# Altium PCB PoactuatorPCB4.PcbDoc (part 1 of 3)
Units mm, origin at the board's own origin, x right, y up, seen from the top; angles counter-clockwise.
Board outline 177.8 x 127 mm, 2 copper layers (Top Layer, Bottom Layer), stack 1.65 mm thick; 145 components, 104 nets, 572 pads, 279 vias.
Unrouted connection lines stored in the file: 19.
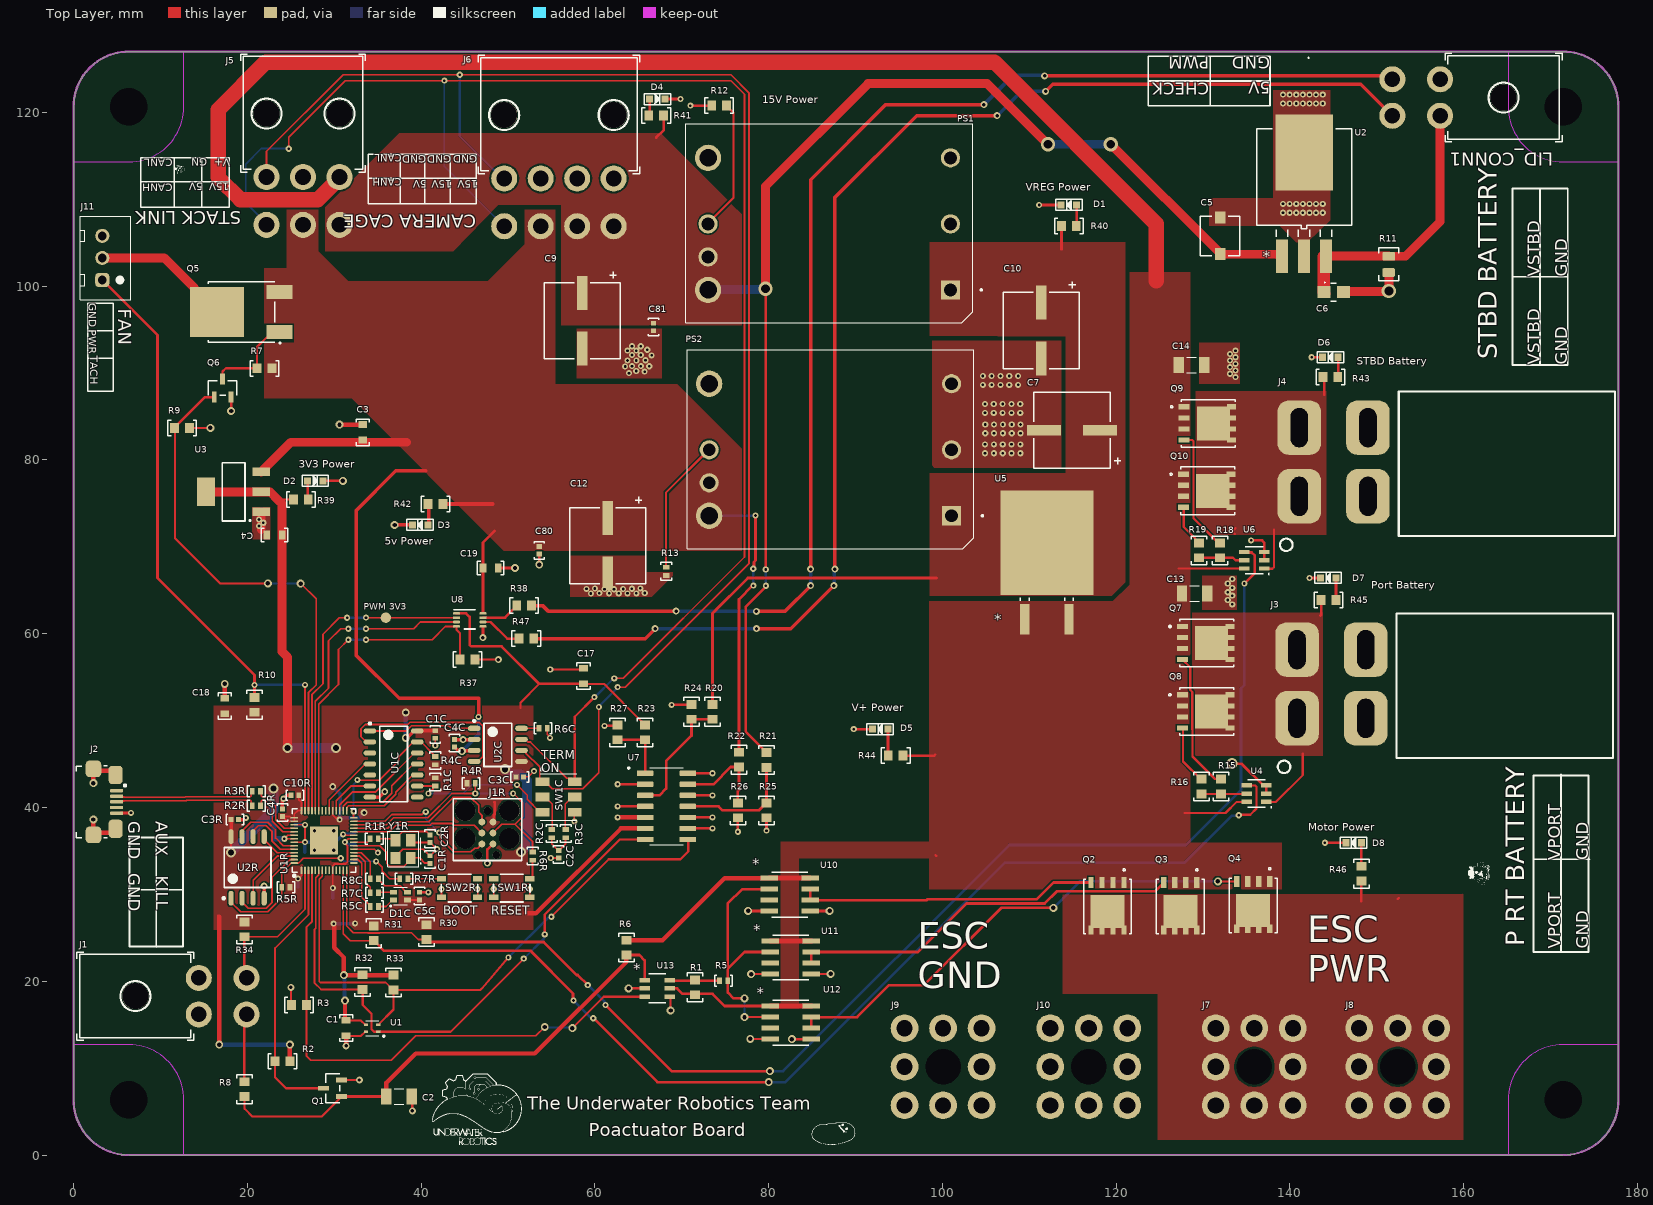
[diagram p0: Top Layer view]
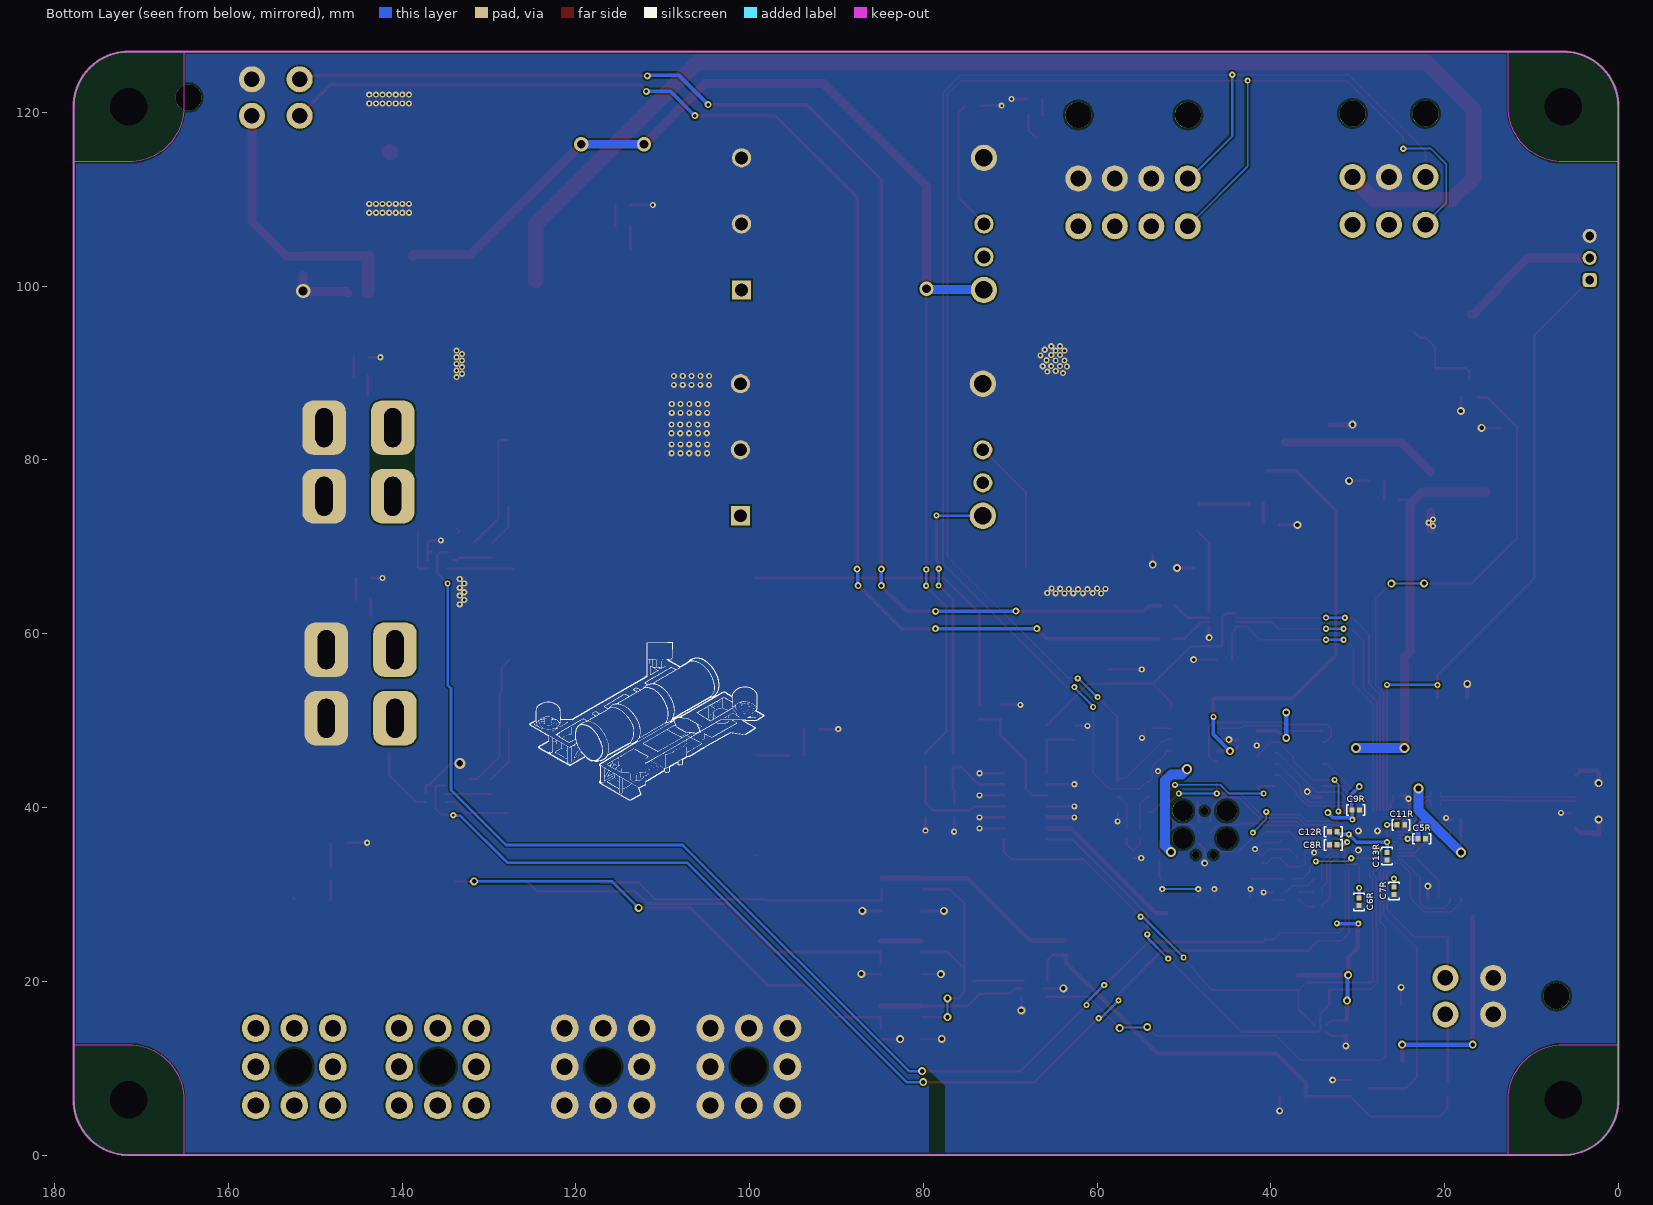
[diagram p1: Bottom Layer view, seen from below]
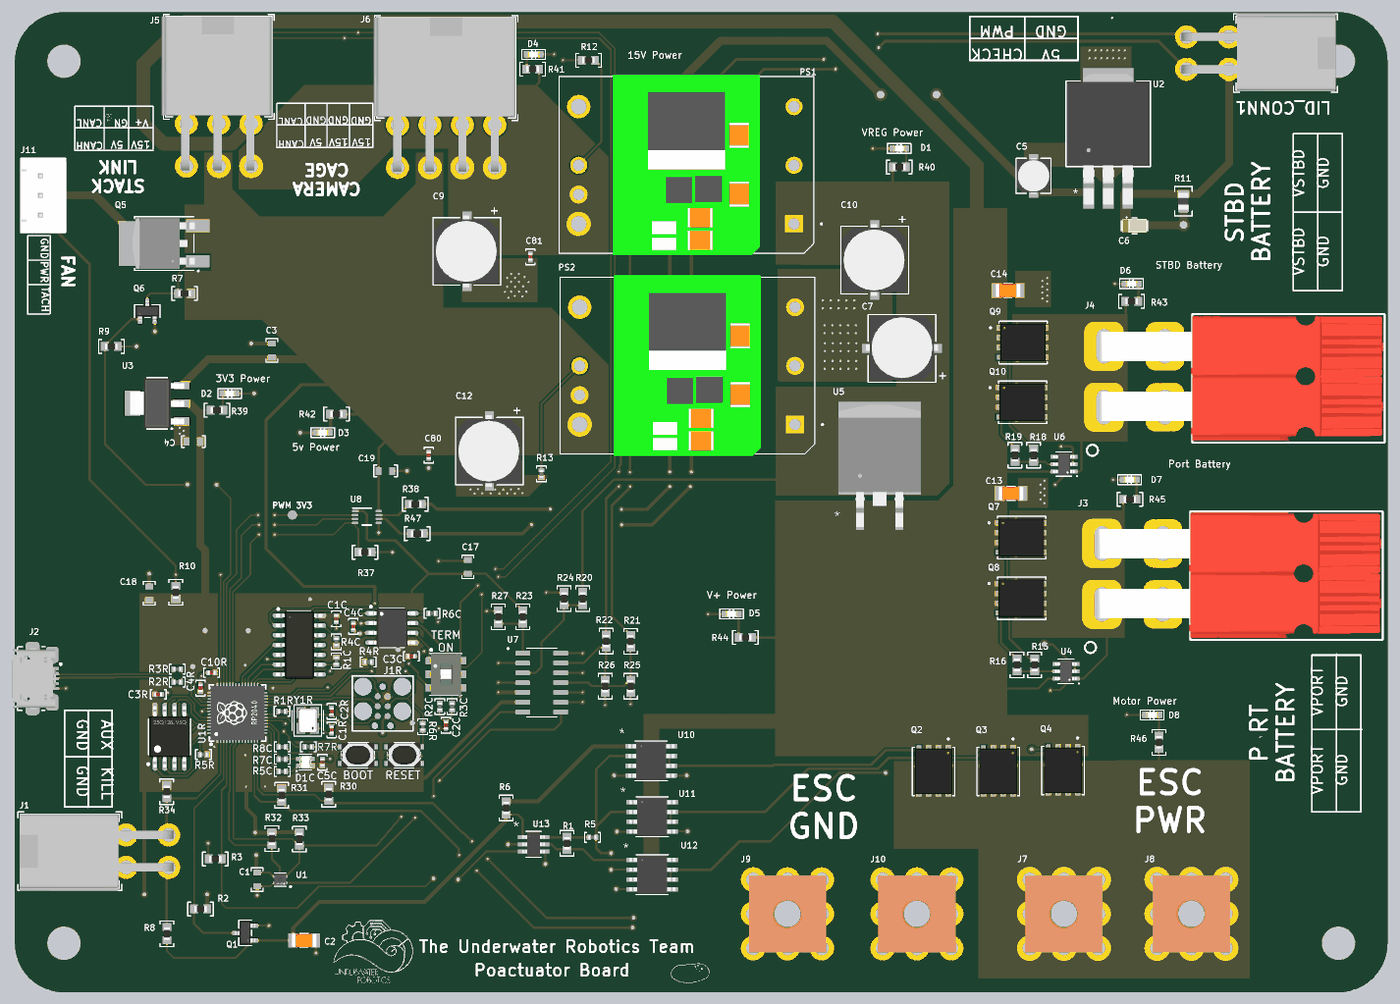
[diagram p3: 3D render of the assembled board from above, using the file's embedded part models]
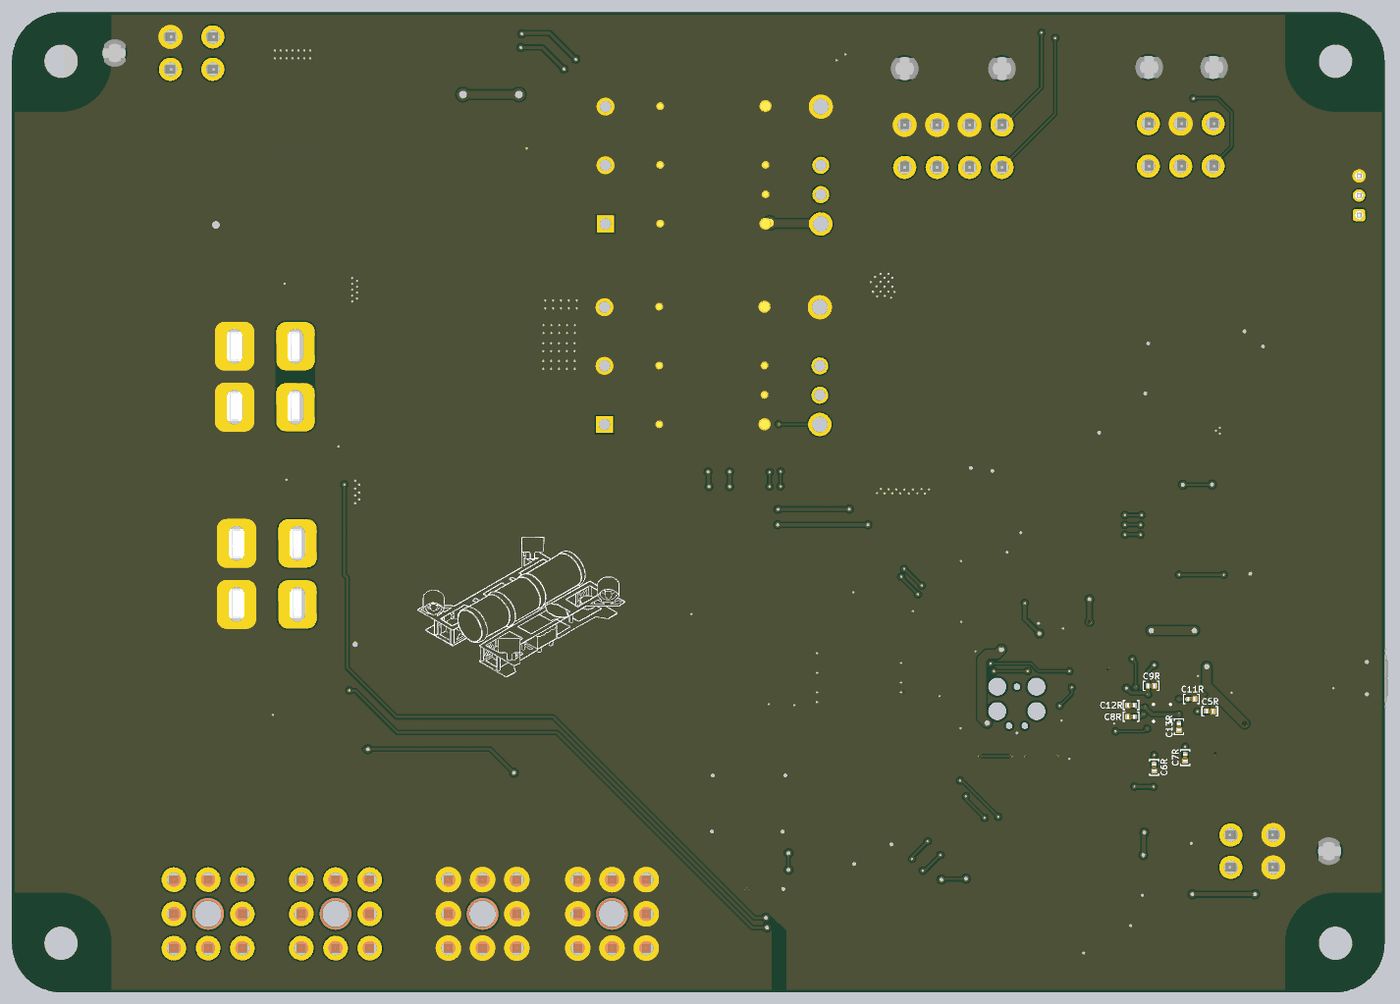
[diagram p4: 3D render of the assembled board from below, using the file's embedded part models]

## Layer stack, top to bottom
Top Solder: solder mask 0.0127, Solder Resist, Dk 3.8
Top Layer: signal copper 0.075
Dielectric: core 1.5, FR-4, Dk 4.5
Bottom Layer: signal copper 0.075
Bottom Solder: solder mask 0.0127, Solder Resist, Dk 3.8

## Board outline
0,6.35 0,120.65 cw(c6.35,120.65) 6.35,127 171.45,127 cw(c171.45,120.65) 177.8,120.65 177.8,6.35 cw(c171.45,6.35) 171.45,0 6.35,0 cw(c6.35,6.35)

## Design rules (kind name [scope] priority, off if disabled: settings)
AcuteAngle [All] p1 off: minimum=6.00000000000000E+0001 checktracksonly=FALSE
BoardOutlineClearance "BoardOutlineClearance JLCPCB" [All] p1: gap=0.2 ignorepadtopadclearanceinfootprint=FALSE
Clearance "Clearance JLCPCB 2oz" [All] p1: gap=0.2 ignorepadtopadclearanceinfootprint=FALSE except(0.254: Arc-Hole Track-Hole SMDPad-Hole THPad-Hole Via-Hole Fill-Hole Poly-Hole Region-Hole Text-Hole)
DiffPairsRouting [All] p1: maxlimit=0.254 minlimit=0.152 mostfreqgap=0.203 toplayer_minwidth=0.203 toplayer_maxwidth=0.381 toplayer_prefwidth=0.203 bottomlayer_minwidth=0.203 bottomlayer_maxwidth=0.381 bottomlayer_prefwidth=0.203 maxuncoupledlength=12.7
HoleSize "HoleSize JLCPCB Pad" [IsPad] p1: absolutevalues=TRUE maxlimit=6.3 minlimit=0.5 maxpercent=80.000 minpercent=20.000
HoleSize "HoleSize JLCPCB 2 layer" [All] p2: absolutevalues=TRUE maxlimit=6.3 minlimit=0.3 maxpercent=80.000 minpercent=20.000
HoleToHoleClearance "HoleToHoleClearance JLCPCB" [All] p1: gap=0.254 allowstackedmicrovias=TRUE
MinimumAnnularRing "MinimumAnnularRing JLCPCB Pad" [IsPad] p1: minimumring=0.3
MinimumAnnularRing "MinimumAnnularRing JLCPCB 2oz" [All] p2: minimumring=0.2
MinimumSolderMaskSliver [All] p1: minsoldermaskwidth=0.025
PlaneConnect [All] p1: planeconnectstyle=Direct reliefexpansion=0.508 reliefentries=4 reliefconductorwidth=0.254 reliefairgap=0.254
PolygonConnect "PolygonConnect 3V3" [InNet('3V3')] p1: thpad.connectstyle=Relief thpad.reliefconductorwidth=0.254 thpad.reliefentries=4 thpad.polygonreliefangle="90 Angle" thpad.airgapwidth=0.254 smdpad.connectstyle=Relief smdpad.reliefconductorwidth=0.254 smdpad.reliefentries=4 smdpad.polygonreliefangle="90 Angle" smdpad.airgapwidth=0.254 via.connectstyle=Direct via.reliefconductorwidth=0.254 via.reliefentries=4 via.polygonreliefangle="90 Angle" via.airgapwidth=0.254
PolygonConnect "PolygonConnect Direct Connect" [All] p2: connectstyle=Direct reliefconductorwidth=0.381 reliefentries=4 polygonreliefangle="45 Angle" airgapwidth=0.254
RoutingVias "RoutingVias JLCPCB" [All] p1: holewidth=0.4 width=0.8 viastyle="Through Hole" minholewidth=0.3 minwidth=0.4 maxholewidth=0.711 maxwidth=1.27
SilkToSilkClearance [All] p1: silktosilkclearance=0.076
SilkToSolderMaskClearance "SilkToSolderMaskClearance JLCPCB" [IsPad] p1: minsilkscreentomaskgap=0.15 clearancetoexposedcopper=TRUE
SolderMaskExpansion "SolderMaskExpansion JLCPCB" [All] p1: expansion=0.05 istentingtop=FALSE
Width "Width JLCPCB 2oz" [All] p1: maxlimit=5.08 minlimit=0.2 preferedwidth=0.254 minimp=50.000000 maximp=50.000000 favimp=50.000000
23 further rules are at their usual default settings.

## Classes and differential pairs
component class U_PD_MK2_Killswitch: C2 Q1 Q2 Q3 Q4 R1 R2 R3 R5 R6 R8 U10 U11 U12 U13
differential pair class "USB 2.0": USB USB_RP2040
component class U_RP2040_with_CAN: C1C C2C C3C C4C C5C D1C R1C R2C R3C R4C R5C R6C R7C R8C SW1C U1C U2C
component class U_RP2040_C: C1R C2R C3R C4R C5R C6R C7R C8R C9R C10R C11R C12R C13R J1R R1R R2R R3R R4R R5R R6R R7R SW1R SW2R U1R U2R Y1R
component class U_PD_MK2_Circuits: C1 C17 C18 C19 Q5 Q6 R7 R9 R10 R20 R21 R22 R23 R24 R25 R26 R27 R30 R31 R32 R33 R34 R37 R38 R47 U1 U7 U8
component class U_PD_MK2_Power: C3 C4 C5 C6 C7 C9 C10 C12 C13 C14 C80 C81 PS1 PS2 Q7 Q8 Q9 Q10 R11 R12 R13 R15 R16 R18 R19 U2 U3 U4 U5 U6
component class Poactuator_Connectors: D1 D2 D3 D4 D5 D6 D7 D8 J1 J2 J3 J4 J5 J6 J7 J8 J9 J10 J11 R39 R40 R41 R42 R43 R44 R45 R46
differential pair USB: +USB_P -USB_N
differential pair USB_RP2040: +USB_RP2040_P -USB_RP2040_N

## Components (designator, comment, footprint, x,y, rotation, side; value= is the part's Value field where it differs from the comment)
C1 "100nF Ceramic 6.3V" CAPACITOR_0603 31.369,14.605 r270 top value=0.1uF
C1C "100nF Ceramic 25V" CAPACITOR_0402#1 41.629,48.405 r270 top value=0.1uF
C1R "27pF Ceramic 50V" CAPACITOR_0402#1 41.029,34.005 r90 top value=27pF
C2 "10uF Ceramic 25V" CAPACITOR_1206 37.465,6.731 r0 top
C2C "4700pF Ceramic 25V" CAPACITOR_0402#1 55.829,34.605 r90 top value=4.7nF
C2R "27pF Ceramic 50V" CAPACITOR_0402#1 41.029,36.405 r270 top value=27pF
C3 "10uF Ceramic 6.3V" CAPACITOR_0603 33.274,83.185 r90 top
C3C "100nF Ceramic 25V" CAPACITOR_0402#1 51.358,43.525 r0 top value=0.1uF
C3R "100nF Ceramic 6.3V" CAPACITOR_0402#1 18.559,38.605 r0 top value=0.1uF
C4 "10uF Ceramic 6.3V" CAPACITOR_0603 23.114,71.361 r180 top
C4C "100nF Ceramic 25V" CAPACITOR_0402#1 43.829,47.405 r90 top value=0.1uF
C4R "1uF Ceramic 16V" CAPACITOR_0402#1 24.029,39.405 r90 top value=1uF
C5 "0.1uF electrolytic 35 V" U2-D_NCH 131.953,105.791 r90 top value=0.1uF
C5C "1uF Ceramic 16V" CAPACITOR_0402#1 39.829,29.805 r90 top value=1uF
C5R "100nF Ceramic 6.3V" CAPACITOR_0402#1 22.629,36.405 r180 bottom value=0.1uF
C6 "10uF Tantalum 16V" "CAPACITOR_1206 - POLAR" 145.034,99.314 r0 top
C6R "100nF Ceramic 6.3V" CAPACITOR_0402#1 29.845,29.137 r270 bottom value=0.1uF
C7 "100uF electrolytic 35 V" PCAP_8x5.4-ELECT_NCA 114.91,83.439 r180 top value=100uF
C7R "100nF Ceramic 6.3V" CAPACITOR_0402#1 25.829,30.405 r270 bottom value=0.1uF
C8R "100nF Ceramic 6.3V" CAPACITOR_0402#1 32.829,35.702 r0 bottom value=0.1uF
C9 "22uF electrolytic 35 V" PCAP_8x5.4-ELECT_NCA 58.547,96.012 r270 top value=22uF
C9R "100nF Ceramic 6.3V" CAPACITOR_0402#1 30.229,39.705 r180 bottom value=0.1uF
C10 "100uF electrolytic 35 V" PCAP_8x5.4-ELECT_NCA 111.379,94.894 r270 top value=100uF
C10R "100nF Ceramic 6.3V" CAPACITOR_0402#1 25.473,41.412 r180 top value=0.1uF
C11R "1uF Ceramic 16V" CAPACITOR_0402#1 25.029,38.005 r180 bottom value=1uF
C12 "22uF electrolytic 35 V" PCAP_8x5.4-ELECT_NCA 61.468,70.129 r270 top value=22uF
C12R "100nF Ceramic 6.3V" CAPACITOR_0402#1 32.829,37.205 r0 bottom value=0.1uF
C13 "10uF Ceramic 25V" CAPACITOR_1206 129.032,64.643 r0 top
C13R "100nF Ceramic 6.3V" CAPACITOR_0402#1 26.629,34.405 r270 bottom value=0.1uF
C14 "10uF Ceramic 25V" CAPACITOR_1206 128.651,90.932 r0 top
C17 "100nF Ceramic 6.3V" CAPACITOR_0603 58.674,55.118 r90 top value=0.1uF
C18 "100nF Ceramic 6.3V" CAPACITOR_0603 17.399,51.689 r90 top value=0.1uF
C19 "100nF Ceramic 6.3V" CAPACITOR_0603 48.006,67.564 r0 top value=0.1uF
C80 "CL05A104KA5NNNC" CAPACITOR_0402#2 53.594,69.596 r270 top
C81 "CL05A104KA5NNNC" CAPACITOR_0402#2 66.76,95.3 r270 top
D1 "IN-S63AT5G" LED_0603 114.554,109.347 r180 top
D1C "EAST1616RGBB4" LED_0606_4SMD 37.629,29.805 r0 top
D2 "IN-S63AT5G" LED_0603 27.813,77.597 r0 top
D3 "IN-S63AT5G" LED_0603 39.878,72.517 r180 top
D4 "IN-S63AT5G" LED_0603 67.183,121.539 r0 top
D5 "IN-S63AT5G" LED_0603 92.837,49.022 r180 top
D6 "IN-S63AT5G" LED_0603 144.653,91.821 r180 top
D7 "IN-S63AT5G" LED_0603 144.399,66.421 r180 top
D8 "IN-S63AT5G" LED_0603 147.32,35.941 r180 top
J1 "Mini-Fit Jr R/A" "CONN_MOLEX_MINIFIT JR_4 POS_R/A" 7.112,18.288 r270 top
J1R "TagConnect SWD" TC2030-MCP 47.629,39.605 r270 top
J2 "USB_MICRO R/A" CONN_MINIUSB 2.286,40.65 r270 top
J3 "PP45 R/A" "CONN_ANDERSON_PP45_4 POS_R/A" 148.717,50.266 r90 top
J4 "PP45 R/A" "CONN_ANDERSON_PP45_4 POS_R/A" 148.971,75.819 r90 top
J5 "Mini-Fit Jr R/A" "CONN_MOLEX_MINIFIT JR_6 POS_R/A" 30.607,119.861 r180 top
J6 "Mini-Fit Jr R/A" "CONN_MOLEX_MINIFIT JR_8 POS_R/A" 62.16,119.695 r180 top
J7 "Redcube M4 Term 85A" "Redcube M4 Term 85A" 135.89,10.16 r0 top
J8 "Redcube M4 Term 85A" "Redcube M4 Term 85A" 152.4,10.16 r0 top
J9 "Redcube M4 Term 85A" "Redcube M4 Term 85A" 100.076,10.16 r0 top
J10 "Redcube M4 Term 85A" "Redcube M4 Term 85A" 116.84,10.16 r0 top
J11 "XH2.54 VERT" CONN_JST_XH254_3POS_VERT 3.302,100.711 r90 top
LID_CONN1 "Comment" "CONN_MOLEX_MINIFIT JR_4 POS_R/A" 164.58,121.71 r90 top
PS1 "I6A4W020A033V-001-R" CONV_I6A4W020A033V-001-R 86.975,107.218 r180 top
PS2 "I6A4W020A033V-001-R" CONV_I6A4W020A033V-001-R 87.102,81.223 r180 top
"PWM 3V3" "Comment" TESTPOINT_1.2MM 35.941,61.849 r0 top
Q1 "MOSFET N-CH 30V 5.8A SOT-23-3" SOT-23-3 29.82,7.683 r90 top
Q2 "SIR167DP-T1-GE3" MOSFET_7DP-T1-GE3_VIS 118.999,28.639 r270 top
Q3 "SIR167DP-T1-GE3" MOSFET_7DP-T1-GE3_VIS 127.381,28.639 r270 top
Q4 "SIR167DP-T1-GE3" MOSFET_7DP-T1-GE3_VIS 135.763,28.765 r270 top
Q5 "FDD4141" DPAK_ONS 19.304,97.028 r90 top
Q6 "PMV13XNEAR" SOT-23-3 17.145,88.265 r0 top
Q7 "SIR167DP-T1-GE3" MOSFET_7DP-T1-GE3_VIS 130.365,58.928 r0 top
Q8 "SIR167DP-T1-GE3" MOSFET_7DP-T1-GE3_VIS 130.365,51.054 r0 top
Q9 "SIR167DP-T1-GE3" MOSFET_7DP-T1-GE3_VIS 130.556,84.201 r0 top
Q10 "SIR167DP-T1-GE3" MOSFET_7DP-T1-GE3_VIS 130.493,76.454 r0 top
R1 "47K" RESISTOR_0603#1 71.501,19.304 r270 top
R1C "10k Ohm 1% 1/16W" RESISTOR_0402 41.629,42.94 r270 top
R1R "1k Ohm 1% 1/16W" RESISTOR_0402 34.602,36.405 r0 top
R2 "100k Ohm 0.5% 1/10W" RESISTOR_0603#2 24.041,10.795 r180 top
R2C "60.4 Ohm 1% 1/16W" RESISTOR_0402 55.029,37.005 r270 top
R2R "27 Ohm 1% 1/16W" RESISTOR_0402 21.029,40.205 r0 top
R3 "10k Ohm 5% 1/10W" RESISTOR_0603#2 25.946,17.272 r0 top
R3C "60.4 Ohm 1% 1/16W" RESISTOR_0402 56.629,37.005 r270 top
R3R "27 Ohm 1% 1/16W" RESISTOR_0402 21.029,41.882 r0 top
R4C "10k Ohm 1% 1/16W" RESISTOR_0402 41.629,45.405 r90 top
R4R "10k Ohm 1% 1/16W" RESISTOR_0402 45.754,42.805 r0 top
R5 "1k Ohm 1% 1/16W" RESISTOR_0402 74.803,20.066 r180 top
R5C "604 Ohm 1% 1/16W" RESISTOR_0402 34.629,28.605 r0 top
R5R "10k Ohm 1% 1/16W" RESISTOR_0402 24.429,30.805 r180 top
R6 "100k Ohm 0.5% 1/10W" RESISTOR_0603#2 63.627,23.876 r270 top
R6C "10k Ohm 1% 1/16W" RESISTOR_0402 54.029,49.11 r0 top
R6R "1k Ohm 1% 1/16W" RESISTOR_0402 52.829,34.405 r90 top
R7 "1k Ohm 5% 1/8W" RESISTOR_0603#2 21.971,90.551 r180 top
R7C "200 Ohm 1% 1/16W" RESISTOR_0402 34.629,30.205 r0 top
R7R "1k Ohm 1% 1/16W" RESISTOR_0402 38.01,31.81 r180 top
R8 "1k Ohm 5% 1/8W" RESISTOR_0603#2 19.685,7.582 r90 top
R8C "200 Ohm 1% 1/16W" RESISTOR_0402 34.629,31.805 r0 top
R9 "1k Ohm 5% 1/8W" RESISTOR_0603#2 12.484,83.693 r0 top
R10 "10k Ohm 5% 1/10W" RESISTOR_0603#2 20.828,51.816 r90 top
R11 "1.2k Ohm 5% 1/2W" RESISTOR_0805 151.358,102.507 r270 top
R12 "RES 1.24K OHM 1% 1/10W 0603" RESISTOR_0603#2 74.295,120.777 r180 top
R13 "RES 8.56K OHM 1% 1/16W 0402" RESISTOR_0402 68.199,67.183 r270 top
R15 "27 Ohm 5% 1/8W" RESISTOR_0603#2 132.08,42.418 r270 top
R16 "27 Ohm 5% 1/8W" RESISTOR_0603#2 129.794,42.418 r270 top
R18 "27 Ohm 5% 1/8W" RESISTOR_0603#2 131.953,69.596 r270 top
R19 "27 Ohm 5% 1/8W" RESISTOR_0603#2 129.54,69.596 r270 top
R20 "10k Ohm 0.5% 1/10W" RESISTOR_0603#2 73.533,51.016 r270 top
R21 "10k Ohm 0.5% 1/10W" RESISTOR_0603#2 79.756,45.466 r270 top
R22 "10k Ohm 0.5% 1/10W" RESISTOR_0603#2 76.581,45.504 r270 top
R23 "10k Ohm 0.5% 1/10W" RESISTOR_0603#2 65.786,48.641 r270 top
R24 "1k Ohm 5% 1/10W" RESISTOR_0603#2 71.12,51.016 r90 top
R25 "1k Ohm 5% 1/10W" RESISTOR_0603#2 79.756,39.662 r270 top
R26 "1k Ohm 5% 1/10W" RESISTOR_0603#2 76.454,39.662 r270 top
R27 "10k Ohm 0.5% 1/10W" RESISTOR_0603#2 62.611,48.641 r90 top
R30 "470k Ohm 5% 1/10W" RESISTOR_0603#2 40.64,25.654 r270 top
R31 "470k Ohm 5% 1/10W" RESISTOR_0603#2 34.544,25.527 r270 top
R32 "4.7k Ohm 5% 1/10W" RESISTOR_0603#2 33.274,19.901 r270 top
R33 "4.7k Ohm 5% 1/10W" RESISTOR_0603#2 36.83,19.86 r270 top
R34 "1k Ohm 5% 1/8W" RESISTOR_0603#2 19.658,25.974 r270 top
R37 "10k Ohm 5% 1/10W" RESISTOR_0603#2 45.339,57.023 r0 top
R38 "330 Ohm 1% 1/10W" RESISTOR_0603#2 51.854,63.246 r180 top
R39 "5.1K" RESISTOR_0603#1 26.162,75.438 r0 top
R40 "3.9k Ohm 5% 1/10W" RESISTOR_0603#2 114.554,106.934 r0 top
R41 "4.7k Ohm 5% 1/10W" RESISTOR_0603#2 67.056,119.634 r180 top
R42 "1k Ohm 5% 1/8W" RESISTOR_0603#2 41.656,74.93 r180 top
R43 "3.9k Ohm 5% 1/10W" RESISTOR_0603#2 144.653,89.535 r0 top
R44 "3.9k Ohm 5% 1/10W" RESISTOR_0603#2 94.615,45.974 r180 top
R45 "3.9k Ohm 5% 1/10W" RESISTOR_0603#2 144.437,63.881 r0 top
R46 "3.9k Ohm 5% 1/10W" RESISTOR_0603#2 148.209,32.385 r90 top
R47 "330 Ohm 1% 1/10W" RESISTOR_0603#2 52.108,59.436 r180 top
SW1C "Switch DPDT" CAS-220TA 55.829,41.205 r270 top
SW1R "434123025826" SMD_434123025826 50.429,30.73 r0 top
SW2R "434123025826" SMD_434123025826 44.429,30.73 r0 top
U1 "SHT14 SENSOR HUMID/TEMP" XDCR_SHT41-AD1B-R2 34.355,14.586 r180 top
U1C "MCP2517FD" SOIC-14 36.829,45.005 r0 top
U1R "RP2040" "QFN-56 RP2040" 28.829,36.205 r90 top locked
U2 "MIC29300-12WU-TR" TO-263-3_MCH 141.62,112.55 r0 top
U2C "CAN Transceiver" SOIC-8 48.829,47.205 r0 top
U2R "W25Q128JVSIQ" "SOIC-8 W25QxJV" 20.029,33.104 r90 top
U3 "LM1117IMPX-3.3/NOPB" SOT-223-4 18.415,76.327 r180 top
U4 "LTC4412ES6TRPBF" TSOT-23_S6 136.144,41.595 r180 top
U5 "MBRB2545CT" D2PAK_VIS 112.014,70.485 r0 top
U6 "LTC4412ES6TRPBF" TSOT-23_S6 135.89,68.453 r180 top
U7 "MCP3428-E/SL" SOIC127P600X175-14N 68.241,40.132 r0 top
U8 "IC TRANSLTR BIDIRECTIONAL 8VSSOP" TXB0102DCUR 45.593,61.595 r0 top
U10 "TC4432EOA713" SOIC8-N_MC_MCH 82.423,29.972 r0 top
U11 "TC4432EOA713" SOIC8-N_MC_MCH 82.55,22.733 r0 top
U12 "TC4432EOA713" SOIC8-N_MC_MCH 82.55,15.24 r0 top
U13 "DG448DV-T1-E3" TSOP6_DG_VIS-M 67.183,19.177 r0 top
Y1R "CRYSTAL 12.0000MHZ 18PF SMD" "4-SMD, NO LEAD CRYSTAL 3.2x2.5mm" 38.829,34.205 r90 top

## Footprints (in the part's own frame and the unit in brackets; to place one, negate y for a bottom-side part, rotate by r counter-clockwise, add the part's x,y. Pads: shape width x height; smd on the part's side, far side on the other; paste and mask are expansions set on the pad)
"4-SMD, NO LEAD CRYSTAL 3.2x2.5mm" [mm]
  rrect0% 1.4x1.1 smd: 1(0,0) 2(2.032,0) 3(2.032,1.778) 4(0,1.778)
  silkscreen extent -1.02,-1.2 3.05,2.92, body extent -0.58,-0.36 2.62,2.14, height 0.82
CAPACITOR_0402#1 [mm]
  rect 0.56x0.6 smd: 1(-0.435,0) 2(0.435,0)
  silkscreen extent -1.02,-0.6 1.02,0.6, body extent -0.5,-0.28 0.5,0.27, height 0.51
CAPACITOR_0402#2 [mm]
  rect 0.56x0.6 smd paste+0 mask+0: 1(-0.435,0) 2(0.435,0)
  silkscreen extent -1.02,-0.6 1.02,0.6, body extent -0.5,-0.28 0.5,0.27, height 0.51
CAPACITOR_0603 [mil] "CAPACITOR 0603"
  rect 30x40 smd: 1(-35,0) 2(35,0)
  silkscreen extent -60,-30 60,30, body extent -31,-16 32,16, height 31
CAPACITOR_1206 [mm]
  rect 1.2x1.82 smd: 1(-1.46,0) 2(1.46,0)
  silkscreen extent -0.54,-0.9 0.54,0.9, body extent -1.6,-0.9 1.6,0.9, height 1.61
"CAPACITOR_1206 - POLAR" [mil]
  rect 58.96x55 smd paste+0 mask+0: 1(-43.52,0) 2(43.52,0)
  silkscreen extent -44,-40 12,48, body extent -67,-36 67,36, height 73
CAS-220TA [mm] "SWITCH SLIDE DPDT 100MA 6V"
  rrect0% 1x1.6 smd: 1(-1.75,-1.85) 2(0,-1.85) 3(1.75,-1.85) 4(-1.75,1.85) 5(0,1.85) 6(1.75,1.85)
  silkscreen extent -3.3,-2.1 2.7,2.1, body extent -2.7,-2.1 2.7,2.1, height 2.51
"CONN_ANDERSON_PP45_4 POS_R/A" [mm] "Anderson Powerpole45 2x2 Red/Black"
  rrect50% 6.25x5 hole 2 slot 4.5 at 0 deg: 1(0,7.9) 2(7.9,7.9) 3(0,0) 4(7.9,0)
  silkscreen extent -6.31,-28.45 12.07,10.11, body extent -4.32,-28.26 11.84,8.45, height 16.17
CONN_JST_XH254_3POS_VERT [mm] "JST XH 2.54mm Pitch 3 Pos Vertical"
  rrect50% 1.62x1.62 hole 1.02: 1(0,0)
  round 1.62 hole 1.02: 2(2.54,0) 3(5.08,0)
  silkscreen extent -2.29,-3.3 7.37,2.54, body extent -2.34,-3.35 7.42,2.49, height 7.21
CONN_MINIUSB [mm] "USB2.0 Micro-B Receptacle SMD R/A"
  rrect50% 0.4x1.5 smd: 1(-1.3,2.675) 2(-0.65,2.675) 3(0,2.675) 4(0.65,2.675) 5(1.3,2.675)
  rrect50% 2.1x1.6 smd: 6(-3.1,2.55) 7(3.1,2.55)
  rrect50% 1.9x1.8 smd: 8(3.8,0) 9(-3.8,0)
  silkscreen extent -4.14,-1.96 4.11,3.75, body extent -3.96,-2.67 3.96,2.99, height 2.72
"CONN_MOLEX_MINIFIT JR_4 POS_R/A" [mm] "Molex Minifit Jr 5569 4 Pos R/A"
  round 3 hole 1.8: 1(2.1,7.3) 2(-2.1,7.3) 3(2.1,12.8) 4(-2.1,12.8)
  round 3 hole 3 unplated mask+0: ""(0,0)
  silkscreen extent -5.08,-6.73 5.08,6.73, body extent -4.8,-6.5 5.2,13.44, height 11.4
"CONN_MOLEX_MINIFIT JR_6 POS_R/A" [mm] "Molex Minifit Jr 5569 6 Pos R/A"
  round 3 hole 1.801: 1(8.4,7.3) 4(8.4,12.8)
  round 3 hole 1.8: 2(4.2,7.3) 3(0,7.3) 5(4.2,12.8) 6(0,12.8)
  round 3 hole 3 unplated mask+0: ""(0,0) ""(8.4,0)
  silkscreen extent -2.98,-6.86 11.38,6.73, body extent -2.58,-6.6 11.62,13.33, height 11.4
"CONN_MOLEX_MINIFIT JR_8 POS_R/A" [mm] "Molex Minifit Jr 5569 8 Pos R/A"
  round 3 hole 1.801: 1(12.6,7.3) 2(8.4,7.3) 5(12.6,12.8) 6(8.4,12.8)
  round 3 hole 1.8: 3(4.2,7.3) 4(0,7.3) 7(4.2,12.8) 8(0,12.8)
  round 3 hole 3 unplated mask+0: ""(0,0) ""(12.6,0)
  silkscreen extent -2.98,-6.86 15.58,6.73, body extent -2.7,-6.6 15.7,13.34, height 11.01
CONV_I6A4W020A033V-001-R [mm]
  rect 2.205x2.205 hole 1.47: 1(-13.95,7.65)
  round 2.205 hole 1.47: 2(-13.95,0.05) 3(-13.95,-7.55) 6(13.95,0.05) 7(13.95,3.85)
  round 3.03 hole 2.02: 4(13.95,-7.55) 8(13.95,7.65)
  silkscreen extent -17.6,-11.45 16.5,11.45, body extent -9.53,-11.68 9.53,11.68, height 9.65
D2PAK_VIS [mil]
  rect 41x138 smd paste+0 mask+0: 1(-100,-347) 3(100,-347)
  rect 422x474 smd paste+0 mask+0: 2(0,0)
  silkscreen extent -120,-264 120,-250, body extent -210,-402 210,223, height 190
DPAK_ONS [mil]
  rect 63x118 smd: 1(-90,-172.5) 2(90,-172.5)
  rect 228x244 smd: 3(0,109.5)
  silkscreen extent -142,-177 138,150, body extent -128,-156 129,160, height 94
LED_0603 [mil] "LED 0603"
  rect 32x32 smd: 1(-35,0) 2(35,0)
  silkscreen extent -60,-25 60,25, body extent -31,-16 32,16, height 28
LED_0606_4SMD [mm]
  rrect0% 0.8x0.55 smd: 1(-0.8,-0.45) 2(-0.8,0.45) 3(0.8,0.45) 4(0.8,-0.45)
  silkscreen extent -1.22,-1.22 0.8,1.02, body extent -0.8,-0.8 0.8,0.8, height 0.35
MOSFET_7DP-T1-GE3_VIS [mil]
  rect 50x24 smd: 1(-107.5,75) 2(-107.5,25) 3(-107.5,-25) 4(-107.5,-75)
  rect 150x154 smd: D(24.5,0)
  rect 40x24 smd: D(107.5,75) D(107.5,-25) D(107.5,25) D(107.5,-75)
  Top Layer region: 1.75,77 1.75,77 1.75,77 1.75,77 1.75,77 1.75,77 1.75,77 1.75,77
  Top Layer region: 1.75,-77 1.75,-77 1.75,-77 1.75,-77 1.75,-77 1.75,-77 1.75,-77 1.75,-77
  silkscreen extent -169,-109 125,109, body extent -121,-101 121,101, height 41
PCAP_8x5.4-ELECT_NCA [mil]
  rect 154x47 smd paste+0 mask+0: 1(-126,0) 2(126,0)
  silkscreen extent -222,-173 173,173, body extent -183,-167 183,160, height 219
"QFN-56 RP2040" [mm] "QFN, 56-Leads, Body 7.00x7.00mm, Pitch 0.40mm, Thermal Pad 3.10x3.10mm, IPC Medium Density"
  oval 0.875x0.2 smd: 1(-3.437,2.6) 2(-3.437,2.2) 3(-3.437,1.8) 4(-3.437,1.4) 5(-3.437,1) 6(-3.437,0.6) 7(-3.437,0.2) 8(-3.437,-0.2) 9(-3.437,-0.6) 10(-3.437,-1) 11(-3.437,-1.4) 12(-3.437,-1.8) 13(-3.437,-2.2) 14(-3.437,-2.6) 29(3.437,-2.6) 30(3.437,-2.2) 31(3.437,-1.8) 32(3.437,-1.4) 33(3.437,-1) 34(3.437,-0.6) 35(3.437,-0.2) 36(3.437,0.2) 37(3.437,0.6) 38(3.437,1) 39(3.437,1.4) 40(3.437,1.8) 41(3.437,2.2) 42(3.437,2.6)
  oval 0.2x0.875 smd: 15(-2.6,-3.437) 16(-2.2,-3.437) 17(-1.8,-3.437) 18(-1.4,-3.437) 19(-1,-3.437) 20(-0.6,-3.437) 21(-0.2,-3.437) 22(0.2,-3.437) 23(0.6,-3.437) 24(1,-3.437) 25(1.4,-3.437) 26(1.8,-3.437) 27(2.2,-3.437) 28(2.6,-3.437) 43(2.6,3.437) 44(2.2,3.437) 45(1.8,3.437) 46(1.4,3.437) 47(1,3.437) 48(0.6,3.437) 49(0.2,3.437) 50(-0.2,3.437) 51(-0.6,3.437) 52(-1,3.437) 53(-1.4,3.437) 54(-1.8,3.437) 55(-2.2,3.437) 56(-2.6,3.437)
  rect 3.2x3.2 smd: 57(0,0)
  silkscreen extent -4.19,-3.65 3.65,3.65, body extent -3.52,-3.52 3.52,3.52, height 0.85
"Redcube M4 Term 85A" [mm]
  round 3.2 hole 1.85: 1(-4.435,-4.435) 1(-4.435,0) 1(-4.435,4.435) 1(0,-4.435) 1(0,4.435) 1(4.435,-4.435) 1(4.435,0) 1(4.435,4.435)
  round 3.2 hole 4.1 unplated: 8(0,0)
  body extent -5,-5 5,5, height 3
RESISTOR_0402 [mm] "Resistor 0402"
  rect 0.55x0.75 smd: 1(-0.475,0) 2(0.475,0)
  silkscreen extent -1.02,-0.64 1.02,0.64, body extent -0.5,-0.25 0.5,0.25, height 0.25
RESISTOR_0603#1 [mil] "Resistor 0603"
  rect 40x45 smd paste+0 mask+0: 1(-33.5,0) 2(33.5,0)
  silkscreen extent -65,-35 65,35, body extent -31,-16 32,16, height 16
RESISTOR_0603#2 [mil] "Resistor 0603"
  rect 40x45 smd: 1(-33.5,0) 2(33.5,0)
  silkscreen extent -65,-35 65,35, body extent -31,-16 32,16, height 16
RESISTOR_0805 [mm]
  rrect25% 1x1.42 smd: 1(-0.935,0) 2(0.935,0)
  silkscreen extent -1.91,-1.14 1.91,1.14, body extent -1.11,-0.67 1.1,0.67, height 0.61
SMD_434123025826 [mm]
  rect 1.05x0.65 smd: A1(-2.075,1.075) A2(2.075,1.075) B1(-2.075,-1.075) B2(2.075,-1.075)
  silkscreen extent -2.1,-1.6 2.1,1.6, body extent -2.3,-1.6 2.3,1.6, height 2.5
SOIC8-N_MC_MCH [mil]
  rect 78x22 smd paste+0 mask+0: 1(-93,75) 2(-93,25) 3(-93,-25) 4(-93,-75) 5(93,-75) 6(93,-25) 7(93,25) 8(93,75)
  silkscreen extent -82,-102 82,102, body extent -118,-96 118,96, height 69
SOIC127P600X175-14N [mm]
  rrect25% 1.9x0.6 smd: 1(-2.455,3.81) 2(-2.455,2.54) 3(-2.455,1.27) 4(-2.455,0) 5(-2.455,-1.27) 6(-2.455,-2.54) 7(-2.455,-3.81) 8(2.455,-3.81) 9(2.455,-2.54) 10(2.455,-1.27) 11(2.455,0) 12(2.455,1.27) 13(2.455,2.54) 14(2.455,3.81)
  silkscreen extent -4.45,-4.43 1.95,4.51
SOIC-8 [mm] "SOIC, 8-Leads, Body 4.90x3.90mm, Pitch 1.27mm, IPC Medium Density"
  oval 1.45x0.6 smd: 1(-2.725,1.905) 2(-2.725,0.635) 3(-2.725,-0.635) 4(-2.725,-1.905) 5(2.725,-1.905) 6(2.725,-0.635) 7(2.725,0.635) 8(2.725,1.905)
  silkscreen extent -2.85,-2.5 1.6,2.88, body extent -3,-2.5 3,2.5, height 1.75
"SOIC-8 W25QxJV" [mm] "SOIC, 8-Leads, Body 5.28x5.28mm, Pitch 1.27mm, IPC Medium Density"
  oval 1.7x0.6 smd: 1(-3.55,1.905) 2(-3.55,0.635) 3(-3.55,-0.635) 4(-3.55,-1.905) 5(3.55,-1.905) 6(3.55,-0.635) 7(3.55,0.635) 8(3.55,1.905)
  silkscreen extent -3.67,-2.7 2.3,2.88, body extent -3.95,-2.62 3.95,2.62, height 1.95
SOIC-14 [mm] "SOIC, 14-Leads, Body 8.65x3.90mm, Pitch 1.27mm, IPC Medium Density"
  oval 1.45x0.6 smd: 1(-2.725,3.81) 2(-2.725,2.54) 3(-2.725,1.27) 4(-2.725,0) 5(-2.725,-1.27) 6(-2.725,-2.54) 7(-2.725,-3.81) 8(2.725,-3.81) 9(2.725,-2.54) 10(2.725,-1.27) 11(2.725,0) 12(2.725,1.27) 13(2.725,2.54) 14(2.725,3.81)
  silkscreen extent -2.85,-4.35 1.6,4.78, body extent -3,-4.4 3,4.4, height 1.7
SOT-23-3 [mil]
  rect 22x50 smd paste+0 mask+4: 1(-37.5,-41) 2(37.5,-41) 3(0,41)
  silkscreen extent -65,-33 65,33, body extent -60,-52 60,52, height 44
SOT-223-4 [mm]
  rect 2.05x1 smd paste+0 mask+0.102: 1(-3.175,2.3) 2(-3.175,0) 3(-3.175,-2.3)
  rect 2.05x3.25 smd paste+0 mask+0.102: 4(3.175,0)
  silkscreen extent -1.96,-3.35 1.3,3.35, body extent -3.5,-3.25 3.5,3.25, height 1.68
TC2030-MCP [mil]
  round 31 smd: 1(50,-25) 2(50,25) 3(100,-25) 4(100,25) 5(150,-25) 6(150,25)
  round 34 hole 35 unplated: A(0,0) B(200,40) C(200,-40)
  round 92 hole 93 unplated: D(0,-100) E(125,-100) F(0,100) G(125,100)
  silkscreen extent -55,-155 225,155
TESTPOINT_1.2MM [mm]
  round 1.2 smd: TP(0,0)
TO-263-3_MCH [mil]
  rect 55x150 smd paste+0 mask+0: 1(-100,-358.5) 2(0,-358.5) 3(100,-358.5)
  rect 260x345 smd paste+0 mask+0: 4(0,112)
  silkscreen extent -215,-270 215,218, body extent -210,-411 210,254, height 181
TSOP6_DG_VIS-M [mil]
  rect 47x20 smd paste+0 mask+0: 1(-57,37.4) 2(-57,0) 3(-57,-37.4) 4(57,-37.4) 5(57,0) 6(57,37.4)
  silkscreen extent -38,-66 38,66, body extent -59,-61 59,61, height 43
TSOT-23_S6 [mil]
  rect 48x20 smd: 1(-45,37.4) 2(-45,0) 3(-45,-37.4) 4(45,-37.4) 5(45,0) 6(45,37.4)
  silkscreen extent -69,-62 40,65, body extent -55,-57 55,57, height 39
TXB0102DCUR [mm] "IC TRANSLTR BIDIRECTIONAL 8VSSOP"
  oval 0.85x0.3 smd paste+0 mask+0.051: 1(-1.525,0.75) 2(-1.525,0.25) 3(-1.525,-0.25) 4(-1.525,-0.75) 5(1.525,-0.75) 6(1.525,-0.25) 7(1.525,0.25) 8(1.525,0.75)
  silkscreen extent -1.83,-1.05 0.6,1.15
U2-D_NCH [mil]
  rect 55x48 smd paste+0 mask+0: 1(-83,0) 2(83,0)
  silkscreen extent -90,-90 90,90, body extent -91,-84 91,84, height 278
XDCR_SHT41-AD1B-R2 [mm] "Sensirion AG SHT14 Sensor Humidity/Temp"
  rect 0.5x0.3 smd: 1(-0.7,0.4) 2(-0.7,-0.4) 3(0.7,-0.4) 4(0.7,0.4)
  silkscreen extent -1.45,-0.87 0.75,1.01, body extent -0.75,-0.75 0.75,0.75, height 0.54

## Part data
C1 C17 C18 C19: library part CAPACITOR_0.1uF_0603, "Cap 100nF 6.3V +/-10% / Ceramic 0603", Supplier Part Number 1=399-15351-1-ND, Tolerance="+/- 10%", Voltage=6.3V, ComponentLink1Description=Datsheet, ComponentLink1URL=https://www.mouser.com/datasheet/2/212/KEM_C1002_X7R_SMD-1102033.pdf, Made By="Flip B", Supplier 1=Digi-Key
C1C C3C C3R C4C C5R C6R C7R C8R C9R C10R C12R C13R: library part CAPACITOR_0.1uF_0402, "Cap 100nF 25V +/-10% / Ceramic 0402", Supplier Part Number 1=478-7868-1-ND, Tolerance="+/- 10%", Voltage=25V, Made By="Robert Pafford", Supplier 1=Digi-Key
C1R C2R: library part CAPACITOR_0.000027uF_0402, "Cap 27pF 50V +/-5% / Ceramic 0402", Supplier Part Number 1=445-5589-1-ND, Tolerance="+/- 5%", Voltage=50V, Made By="Robert Pafford", Supplier 1=Digi-Key
C2 C13 C14: library part CAPACITOR_10uF_1206, "Cap 10uF 25V +/-10% / Ceramic 1206", Supplier Part Number 1=1276-1804-6-ND, Tolerance="+/- 10%", Value (uF)="10 uF", Voltage=25V, Made By="Robert Pafford", Supplier 1=Digi-Key
C2C: library part CAPACITOR_0.0047uF_0402, "4700 pF +/-10% 25V Ceramic Capacitor X7R 0402", Supplier Part Number 1=478-6195-1-ND, Tolerance="+/- 10%", Voltage=25V, Made By="Robert Pafford", Supplier 1=Digi-Key
C3 C4: library part CAPACITOR_10uF_0603, "Cap 10uF 6.3V +/-20% / Ceramic 0603", Supplier Part Number 1=1276-1119-1-ND, Tolerance="+/- 20%", Value (uF)="10 uF", Voltage=6.3V, ComponentLink1Description=Digikey, ComponentLink1URL=https://www.digikey.com/en/products/detail/samsung-electro-mechanics/CL10A106MQ8NNNC/3886777, Made By="Flip B", Supplier 1=Digi-Key
C4R C5C C11R: library part CAPACITOR_1uF_0402, "Cap 1uF 16V +/-10% / Ceramic 0402", Supplier Part Number 1=478-0402YD105KAT4ADKR-ND, Tolerance="+/- 10%", Voltage=16V, Made By="Robert Pafford", Supplier 1=Digi-Key
C5: library part "CAP ALUM 0.1UF 20% 35V SMD", "0.1 µF 35 V Aluminum Electrolytic Capacitors Radial, Can - SMD 7000 Hrs @ 105°C", Manufacturer_Part_Number=UCB1V0R1MCL1GS, Mfr_Name=Nichicon, Supplier Part Number 1=493-9956-1-ND, Copyright="Copyright (C) 2022 Ultra Librarian. All rights reserved.", Made By="Tyson Nguyen", RefDes=RefDes, Supplier 1=Digi-Key, Type=DEV
C6: library part CAPACITOR_10uF_1206_Tantalum_1, "Cap 10uF 16V +/-20% / Tantalum 1206", Supplier Part Number 1=26AC4143, Tolerance="+/- 10%", Value (uF)="10 uF", Voltage=16V, ComponentLink1Description=Digikey, ComponentLink1URL=https://www.digikey.com/en/products/detail/kyocera-avx/F981A106MMA/4004990, Made By="Dylan T", Supplier 1=Newark
C7 C10: library part "CAP ALUM 100UF 20% 35V SMD", "100 µF 35 V Aluminum Electrolytic Capacitors Radial, Can - SMD 1000 Hrs", Manufacturer_Part_Number=UCB1V0R1MCL1GS, Mfr_Name=Nichicon, Supplier Part Number 1=85Y4753, Copyright="Copyright (C) 2022 Ultra Librarian. All rights reserved.", Made By="Tyson Nguyen", RefDes=RefDes, Supplier 1=Newark, Type=DEV
C9 C12: library part "CAP ALUM 22UF 20% 35V SMD", "22 µF 35 V Aluminum Electrolytic Capacitors Radial, Can - SMD 1000 Hrs", Supplier Part Number 1=PCE3952DKR-ND, Voltage=35V, Made By="Robert Pafford", Supplier 1=Digi-Key
C80 C81: library part "CAP CER 0.1UF 25V X5R 0402", "0.1 µF ±10% 25V Ceramic Capacitor X5R 0402 (1005 Metric)", Capacitance=0.1uF, Rated Voltage=25V, Tolerance="+/- 10%", ComponentLink1Description="Data Sheet", ComponentLink1URL=https://mm.digikey.com/Volume0/opasdata/d220001/medias/docus/503/CL05A104KA5NNNC.pdf, Name="Zach Ramsey"
D1 D2 D3 D4 D5 D6 D7 D8: library part LED_Green_0603_3V, "LED Green Vf= 3V If = 0.005A / IN-S63AT5G", Color=Green, Forward Current=5mA, Forward Voltage=3V, Package=0603, Supplier Part Number 1=1830-1062-1-ND, ComponentLink1Description=Datasheet, ComponentLink1URL=https://www.we-online.de/katalog/datasheet/150060GS75000.pdf, Made By="Robert Pafford", Supplier 1=Digi-Key
D1C: library part LED_RGB_4SMD, "LED RGB CLEAR 4SMD", Blue Forward Current=5mA, Blue Forward Voltage=2.8V, Color=RGB, Package=4-SMD, Red Forward Voltage=1.8V, Supplier Part Number 1=1080-1552-1-ND, ComponentLink1Description=Datasheet, ComponentLink1URL=https://everlightamericas.com/index.php?controller=attachment&id_attachment=3220, Green Forward Current=5mA, Green Forward Voltage=2.8V, Made By="Robert Pafford", Red Forward Current=5mA, Supplier 1=Digi-Key
J1: library part "CONN_MOLEX_MINIFIT JR_4POS_R/A", "Molex Minifit Jr. 5569  / 4 Pos R/A Natural", Color=Natural, Current Per Pin=13A, Manufacturer=Molex, Supplier Part Number 1=WM13112-ND, ComponentLink1Description=Datasheet, ComponentLink1URL=https://www.molex.com/pdm_docs/sd/026013115_sd.pdf, Configuration="Right Angle", Created By="Flip B", Number of Positions=4, Pitch=4.2mm, Series="Minifit Jr 5569", Supplier 1=Digi-Key
J1R: library part TC2030_SWD, "TagConnect TC2030 ARM SWD 6-pin"
J2: library part CONN_MICROUSB, "Amphenol Micro USB-B / USB2.0 5 Pin Right Angle SMD", Color=Silver, Current Per Pin=1.8A, Manufacturer=Amphenol, Supplier Part Number 1=609-4613-1-ND, ComponentLink1Description=Datasheet, ComponentLink1URL=https://cdn.amphenol-icc.com/media/wysiwyg/files/documentation/datasheet/inputoutput/io_usb_micro.pdf?__cf_chl_jschl_tk__=05693735e19256298f6ef6ca2bb2e65c376a4f56-1625503833-0-Abitsb0-ufjOXJYs_S3J3r2iTn-nObalbmXUksF1VvO_h_WEmRdMlUD1I8-hmWSEVWzY1pirKnrPZWfgY3851qyBZe5ZvnNQePLGIzUgdEIQBVUyW36RsbYpDLEWxJ4horD-5gChFgobLYqwmG5aHl0E8lIn_twwPPrOxilK2gP0q9t_CNOs_u5fMqXvXUrlsOv8tIE2NRlu6NVP8qtkL2GjhlkeTUbDMF8WvvpPDTFOgvZ4Y16Ej8F8AhWos88mo5B1HssXozw0XrkJQIqERITUu6rqloz9kf4ZzhBHtDAt-IkiAFY_Ds9SW8FYKKTtINJVpHZQ6Gyu1FFM4Dc9MO0maE8_mmNcwlxqyRoRk_MPWW8VyByXWM5RSp52jteRKw7FeI9WIYvCbPAOy0Eyib-aseIQsnGbglBcUY6_2xp8GYaJM38H3dNvBPsSOfJBPndKedwKHllxjkucXn6xsN0sDXkpGN-cu8_2bDTJ0g-uUucKSCooYX-ApSDNGpkA_p9zv1SOAD8c0zaZVmtiBsN75QpVz2rzq9_BFxOywPvR, Configuration="Right Angle", Created By="Flip B", Number of Positions=5, Pitch=0.65mm, Series=10118192, Supplier 1=Digi-Key
J3 J4: library part CONN_ANDERSON_2x2_R/A, "Anderson PP45 / 4 Pos R/A Red/Black", Color=Red/Black, Current Per Pin=45A, Manufacturer=Anderson, Supplier Part Number 1=2243-1337G1-ND, ComponentLink1Description=Datasheet, ComponentLink1URL=https://www.andersonpower.com/content/dam/app/ecommerce/product-pdfs/DS-PP1545.pdf, Configuration="Right Angle", Created By="Flip B", Number of Positions=4, Pitch=7.9mm, Series="PowerPole 45", Supplier 1=Digi-Key, Supplier 2=Digi-Key, Supplier 3=Digi-Key, Supplier 4=Digi-Key, Supplier Part Number 2=2243-1336G1-ND, Supplier Part Number 3=2243-1327-BK-ND, Supplier Part Number 4=A102007-ND
J5: library part "CONN_MOLEX_MINIFIT JR_6POS_R/A", "Molex Minifit Jr. 5569  / 6 Pos R/A Natural", Color=Natural, Current Per Pin=13A, Manufacturer=Molex, Supplier Part Number 1=WM1353-ND, ComponentLink1Description=Datasheet, ComponentLink1URL=https://www.molex.com/pdm_docs/ps/PS-5556-001.pdf, Configuration="Right Angle", Created By="Flip B", Number of Positions=8, Pitch=4.2mm, Series="Minifit Jr 5569", Supplier 1=Digi-Key
J6: library part "CONN_MOLEX_MINIFIT JR_8POS_R/A", "Molex Minifit Jr. 5569  / 8 Pos R/A Natural", Color=Natural, Current Per Pin=13A, Manufacturer=Molex, Supplier Part Number 1=WM1354-ND, ComponentLink1Description=Datasheet, ComponentLink1URL=https://www.molex.com/pdm_docs/ps/PS-5556-001.pdf, Configuration="Right Angle", Created By="Flip B", Number of Positions=8, Pitch=4.2mm, Series="Minifit Jr 5569", Supplier 1=Digi-Key
J7 J8 J9 J10: Current Rating="85 A", Created By="Nahtan Ayer", Screw Size=M4
J11: library part CONN_JST_XH254_3POS_VERT, "JST XH 2.54mm Pitch 3 Pos Vertical", Color=White, Current Per Pin=4A, Manufacturer=JST, ComponentLink1Description="Purchase Link", ComponentLink1URL=https://www.amazon.com/460PCS-XH2-54-Connector-Terminal-Connectors/dp/B09DBGVX5C, Configuration=Vertical, Created By="Robert P", NOTE="Do not use JST 2.5mm parts with this footprint. JST does not make 2.54mm pitch pins, rather only clones make this connector!", Number of Positions=3, Pitch=2.54mm, Series="XH 2.54"
PS1 PS2: "Non-Isolated PoL Module DC DC Converter 1 Output 3.3 ~ 15V 20A 9V - 53V Input", Package="DIP-8 TDK-Lambda", Availability="In Stock", Check_prices=https://www.snapeda.com/parts/I6A4W020A033V-001-R/TDK-Lambda%20Americas%20Inc./view-part/1737324/?ref=eda, MF="TDK-Lambda Americas", MP=I6A4W020A033V-001-R, Price=None, Purchase-URL=https://pricing.snapeda.com/search/part/I6A4W020A033V-001-R/?ref=eda, SnapEDA_Link=https://www.snapeda.com/parts/I6A4W020A033V-001-R/TDK-Lambda%20Americas%20Inc./view-part/1737324/?ref=snap
Q1: library part AO3404A, "N-Channel 30 V 5.8A (Ta) 1.4W (Ta) Surface Mount SOT-23-3", Amp Rating="5.8 A", Package=SOT23-3L, Power Dissipation="1.4W (Ta)", Supplier Part Number 1=785-1004-1-ND, Created By="Dylan T", FET Type=N-Channel, Manufacturer _Part_Number=AO3404A, Rds (on)="28mOhm @ 5.8A, 10V", SourceLibrary=ON_Semiconductor_2020-01-13, Supplier 1=Digi-Key, Vdss=30V, Vendor="Alpha & Omega Semiconductor Inc.", Vgs (Max)="3V @ 5.8A, 10V", Vgs (th)="3V @ 250µA"
Q2 Q3 Q4 Q7 Q8 Q9 Q10: "P-Channel 30 V 60A (Tc) 65.8W (Tc) Surface Mount PowerPAK® SO-8", Mfr_Name=Vishay, Copyright="Copyright (C) 2022 Ultra Librarian. All rights reserved.", Manufacturer_Part_Number=SIR167DP-T1-GE3, RefDes=RefDes, Type=DEV
Q5: "P-Channel 10.8A (Ta), 50A (Tc) 2.4W (Ta), 69W (Tc) Surface Mount D-PAK (TO-252AA)", Amp Rating="10.8 A", Package="D-PAK (TO-252AA)", Power Dissipation="2.4W (Ta), 69W (Tc)", Supplier Part Number 1=FDD4141CT-ND, Created By="Dylan T", FET Type="P-Channel, Power", Manufacturer_Part_Number=FDD4141, Rds (on)="12.3mOhm @ 12.7A, 10V", SourceLibrary=ON_Semiconductor_2020-01-13, Supplier 1=Digi-Key, Vdss="40 V", Vendor="ON Semiconductor", Vgs (Max)=±20V, Vgs (th)="3V @ 250µA"
Q6: "N-Channel 20 V 7.3A (Ta) 610mW (Ta), 8.3W (Tc) Surface Mount TO-236AB", Amp Rating="7.3 A", Package=SOT23-3L, Power Dissipation="610mW (Ta), 8.3W (Tc)", Supplier Part Number 1=771-PMV13XNEAR, Created By="Dylan T", FET Type=N-Channel, Manufacturer _Part_Number=PMV13XNEAR, Rds (on)="15mOhm @ 7.3A, 8V", SourceLibrary=ON_Semiconductor_2020-01-13, Supplier 1=Mouser, Vdss="20 V", Vendor="Nexperia USA Inc.", Vgs (Max)="+/- 12 V", Vgs (th)="1.3V @ 250uA"
R1: library part RC0603JR-1347KL, "47kohm 0603 1/10w", Mfr_Name=Yageo, Copyright="Copyright (C) 2024 Ultra Librarian. All rights reserved.", Manufacturer_Part_Number=RC0603JR-1347KL, RefDes=RefDes, Type=DEV
R1C R4C R4R R5R R6C: library part RESISTOR_10K_0402, "RES 10k OHM 1% 1/16W 0402", Digikey Part Numer=CR0603-JW-104ELFTR-ND, Supplier Part Number 1=YAG3436CT-ND, Tolerance="+/- 1%", Value  (Ohms)=10K, Made By="Robert Pafford", Supplier=Digikey, Supplier 1=Digi-Key, Wattage=1/16W
R1R R5 R6R R7R: library part RESISTOR_1K_0402, "RES 1k OHM 1% 1/16W 0402", Digikey Part Numer=CR0603-JW-104ELFTR-ND, Supplier Part Number 1=13-AC0402FR-131KLCT-ND, Tolerance="+/- 1%", Value  (Ohms)=1K, Made By="Robert Pafford", Supplier=Digikey, Supplier 1=Digi-Key, Wattage=1/16W
R2 R6: library part RESISTOR_100K_0.5%_0603, "RES 100k OHM 0.5% 1/10W 0603", Digikey Part Numer=CR0603-JW-104ELFTR-ND, Supplier Part Number 1=311-2395-1-ND, Tolerance="+/- 0.5%", Value  (Ohms)=100K, ComponentLink1Description=Datasheet, ComponentLink1URL=https://www.bourns.com/docs/product-datasheets/CRxxxxx.pdf, Made By="John Ulm", Supplier=Digikey, Supplier 1=Digi-Key, Wattage=1/10W
R2C R3C: library part RESISTOR_60.4_0402, "RES 60.4 OHM 1% 1/16W 0402", Digikey Part Numer=CR0603-JW-104ELFTR-ND, Supplier Part Number 1=13-AC0402FR-0760R4LCT-ND, Tolerance="+/- 1%", Value  (Ohms)=60.4, Made By="Robert Pafford", Supplier=Digikey, Supplier 1=Digi-Key, Wattage=1/16W
R2R R3R: library part RESISTOR_27_0402, "RES 27 OHM 1% 1/16W 0402", Digikey Part Numer=CR0603-JW-104ELFTR-ND, Supplier Part Number 1=YAG5278DKR-ND, Tolerance="+/- 1%", Value  (Ohms)=27, Made By="Robert Pafford", Supplier=Digikey, Supplier 1=Digi-Key, Wattage=1/16W
R3 R10 R37: library part RESISTOR_10K_0603, "RES 10k OHM 5% 1/10W 0603", Digikey Part Numer=CR0603-JW-104ELFTR-ND, Supplier Part Number 1=2019-RK73B1JTTD103JCT-ND, Tolerance="+/- 5%", Value  (Ohms)=10K, ComponentLink1Description=Datasheet, ComponentLink1URL=https://www.bourns.com/docs/product-datasheets/CRxxxxx.pdf, Made By="Robert Pafford", Supplier=Digikey, Supplier 1=Digi-Key, Wattage=1/8W
R5C: library part RESISTOR_604_0402, "RES 604 OHM 1% 1/16W 0402", Digikey Part Numer=CR0603-JW-104ELFTR-ND, Supplier Part Number 1=13-AC0402FR-07604RLCT-ND, Tolerance="+/- 1%", Value  (Ohms)=604, Made By="Robert Pafford", Supplier=Digikey, Supplier 1=Digi-Key, Wattage=1/16W
R7 R8 R9 R34 R42: library part RESISTOR_1K_0603, "RES 1k OHM 5% 1/8W 0603", Digikey Part Numer=CR0603-JW-104ELFTR-ND, Supplier Part Number 1=2019-RK73B1JTTD102JCT-ND, Tolerance="+/- 5%", Value  (Ohms)=1K, ComponentLink1Description=Datasheet, ComponentLink1URL=https://www.bourns.com/docs/product-datasheets/CRxxxxx.pdf, Made By="Robert Pafford", Supplier=Digikey, Supplier 1=Digi-Key, Wattage=1/8W
R7C R8C: library part RESISTOR_200_0402, "RES 200 OHM 1% 1/16W 0402", Digikey Part Numer=CR0603-JW-104ELFTR-ND, Supplier Part Number 1=YAG3453CT-ND, Tolerance="+/- 1%", Value  (Ohms)=200, Made By="Robert Pafford", Supplier=Digikey, Supplier 1=Digi-Key, Wattage=1/16W
R11: library part RESISTOR_1.2K_0805, "RES 1.2k OHM 5% 1/2W 0805", Supplier Part Number 1=P1.2KADCT-ND, Tolerance="+/- 5%", Value  (Ohms)=1.2K, Made By="Robert Pafford", Supplier 1=Digi-Key, Wattage=1/2W
R12: library part RESISTOR_1.24K_1%_0603, "1.24 kOhms ±1% 0.1W, 1/10W Chip Resistor 0603 (1608 Metric) Automotive AEC-Q200 Thick Film", Supplier Part Number 1=RMCF0603FT1K24CT-ND, Tolerance="+/- 1%", Value (Ohms)=1.24K, Created By="John Ulm", Supplier 1=Digi-Key, Wattage=1/10W
R13: library part RESISTOR_8.56K_1%_0402, "8.56 kOhms ±1% 0.063W, 1/16W Chip Resistor 0402 (1005 Metric) Automotive AEC-Q200, Moisture Resistant Metal Film", Supplier Part Number 1=2019-RN73H1ETTP8561F50CT-ND, Tolerance="+/- 1%", Value (Ohms)=8.56K, Made By="John Ulm", Supplier 1=Digi-Key, Wattage=1/16W
R15 R16 R18 R19: library part RESISTOR_27_0603, "RES 27 OHM 5% 1/8W 0603", Digikey Part Numer=CR0603-JW-104ELFTR-ND, Supplier Part Number 1=2019-RK73B1JTTD270JCT-ND, Tolerance="+/- 5%", Value  (Ohms)=27, ComponentLink1Description=Datasheet, ComponentLink1URL=https://www.bourns.com/docs/product-datasheets/CRxxxxx.pdf, Made By="Robert Pafford", Supplier=Digikey, Supplier 1=Digi-Key, Wattage=1/8W
R20 R21 R22 R23 R27: library part RESISTOR_10K_0.5%_0603, "RES 10k OHM 0.5% 1/10W 0603", Digikey Part Numer=CR0603-JW-104ELFTR-ND, Supplier Part Number 1=749-1695-1-ND, Tolerance="+/- 0.5%", Value  (Ohms)=10K, Made By="Robert Pafford", Supplier=Digikey, Supplier 1=Digi-Key, Wattage=1/10W
R24 R25 R26: library part RESISTOR_1K_0.5%_0603, "RES 1k OHM 0.5% 1/10W 0603", Digikey Part Numer=CR0603-JW-104ELFTR-ND, Supplier Part Number 1=749-1693-1-ND, Tolerance="+/- 0.5%", Value  (Ohms)=1K, Made By="Robert Pafford", Supplier=Digikey, Supplier 1=Digi-Key, Wattage=1/10W
R30 R31: library part RESISTOR_470K_0603, "RES 470k OHM 5% 1/10W 0603", Supplier Part Number 1=RMCF0603JT470KCT-ND, Tolerance="+/- 5%", Value  (Ohms)=470K, ComponentLink1Description=Datasheet, ComponentLink1URL=https://www.bourns.com/docs/product-datasheets/CRxxxxx.pdf, Made By="Robert P", Supplier 1=Digi-Key, Wattage=1/10W
R32 R33 R41: library part RESISTOR_4.7K_0603, "RES 4.7k OHM 5% 1/10W 0603", Digikey Part Numer=CR0603-JW-104ELFTR-ND, Supplier Part Number 1=RMCF0603JT4K70CT-ND, Tolerance="+/- 5%", Value  (Ohms)=4.7K, Made By="Robert Pafford", Supplier=Digikey, Supplier 1=Digi-Key, Wattage=1/10W
R38 R47: library part RESISTOR_330_0603, "RES 330 OHM 1% 1/10W 0603", Supplier Part Number 1=P330HCT-ND, Tolerance="+/- 1%", Value  (Ohms)=330, Made By="Robert Pafford", Supplier 1=Digi-Key, Wattage=1/10W
R39: library part ERA-3AEB512V_2, "5.1 kOhms ±0.1% 0.1W, 1/10W Chip Resistor 0603 (1608 Metric) Automotive AEC-Q200 Thin Film", Mfr_Name=Panasonic, Copyright="Copyright (C) 2023 Ultra Librarian. All rights reserved.", Manufacturer_Part_Number=ERA-3AEB512V_2, RefDes=RefDes, Type=DEV
R40 R43 R44 R45 R46: library part RESISTOR_3.9K_0603, "RES 3.9k OHM 1% 1/10W 0603", Supplier Part Number 1=P3.90KHCT-ND, Tolerance="+/- 1%", Value  (Ohms)=3.9K, Made By="Robert Pafford", Supplier 1=Digi-Key, Wattage=1/10W
SW1C: library part CAS-220TA_CAN_TERM, "GOLD SWITCH FLUSH SLIDE DPDT 100MA 6V", Current Rating="100 mA", Supplier Part Number 1=CAS220JCT-ND, Voltage Rating=6VDC, Contact Finish=Gold, Made By="Robert Pafford", Supplier 1=Digi-Key, Switch Function=DPDT
SW1R SW2R: library part "Tactile Switch SMD", "WS-TASV J-Bend SMT Tact Switch, SPST-NO, 16VDC, 50mA, 260g", Manufacturer="Wurth Elektronik", Operating Temperature Max=85°C, Operating Temperature Min=-40°C, Rated Current=50mA, Rated Voltage=16VDC, Category="Tact Switches", Circuit=SPST-NO, ComponentLink1Description="Website Link", ComponentLink1URL=https://www.we-online.com/redexpert/article/434123025826?ad, ComponentLink2Description="Datasheet Link", ComponentLink2URL=https://www.we-online.com/redexpert/spec/434123025826?ad, Contact Material="Stainless Steel", Contact Plating=Silver, Height=2.5mm, Length=4.2mm, Manufacturer Part Number=434123025826, Match Code=WS-TASV, Mount="Surface Mount", Operation Force=260g, Packaging="Tape and Reel", Terminal Material="Copper Alloy", Terminal Plating=Silver, Washable=No, Width=3.2mm
U1: library part SHT41-AD1B-R2, "Digital Relative Humidity Temperature Sensor, Â±1.8 / max 2.5 %RH, Â±0.2 Â°C, Ultra-Low-Power", Package=None, Supplier Part Number 1=1649-SHT41-AD1B-R2CT-ND, Availability="In Stock", Check_prices=https://www.snapeda.com/parts/SHT41-AD1B-R2/Sensirion/view-part/?ref=eda, MF=Sensirion, MP=SHT41-AD1B-R2, Price=None, Purchase-URL=https://pricing.snapeda.com/search/part/SHT41-AD1B-R2/?ref=eda, SnapEDA_Link=https://www.snapeda.com/parts/SHT41-AD1B-R2/Sensirion/view-part/?ref=snap, Supplier 1=Digi-Key
U1C: "CANbus Controller CAN 2.0 SPI Interface 14-SOIC", Made By="Robert Pafford", Max FD Rate="8 Mbps"
U1R: "Raspberry Pi RP2040", Crystal Frequency="12 MHz", Input Voltage=3.3V, Available Busses="SPI, I2C, PWM, USB", ComponentLink1Description=DigiKey, ComponentLink2Description=Datasheet, ComponentLink2URL=https://datasheets.raspberrypi.org/rp2040/rp2040-datasheet.pdf, Made By="Robert Pafford", Number of GPIOs=29
U2: "Linear Voltage Regulator IC Positive Fixed 1 Output 3A TO-263-3", Mfr_Name=Microchip, Copyright="Copyright (C) 2022 Ultra Librarian. All rights reserved.", Manufacturer_Part_Number=MIC29300-12WU-TR, RefDes=RefDes, Supplier 1="Arrow Electronics", Supplier Part Number 1=MIC29300-12WU-TR, Type=DEV
U2C: library part TJA1442AT, "CAN Interface IC High-Speed CAN Transceiver with Standby Mode", Supplier Part Number 1=771-TJA1442AT/0Z, Made By="Robert Pafford", Max Data Rate=5Mbps, Supplier 1=Mouser
U2R: "IC FLASH 128MBIT SPI/QUAD 8SOIC", Supplier Part Number 1=W25Q128JVSIQ-ND, Made By="Robert Pafford", Size=128M, Supplier 1=Digi-Key
U3: "800-mA 15-V linear voltage regulator 4-SOT-223 -40 to 125", Package="SOT-223-4 Texas Instruments", Arrow_Electronics-Purchase-URL=https://snapeda.com/shop?store=Arrow+Electronics&id=410186, Availability=Good, DigiKey-Purchase-URL=https://snapeda.com/shop?store=DigiKey&id=410186, MF="Texas Instruments", Mouser-Purchase-URL=https://snapeda.com/shop?store=Mouser&id=410186, MP=LM1117IMPX-3.3/NOPB, Price=None, SnapEDA_Link=https://www.snapeda.com/parts/LM1117IMPX-3.3/NOPB/Texas%20Instruments/view-part/410186/?ref=snap, Texas_Instruments-Purchase-URL=https://snapeda.com/shop?store=Texas+Instruments&id=410186
U4 U6: "OR Controller Source Selector Switch P-Channel 2:1 TSOT-23-6", Package="SOT-23-6 Analog Devices", Arrow_Europe-Purchase-URL=https://snapeda.com/shop?store=Arrow+Europe&id=4343773, Availability=Good, Check_prices=https://www.snapeda.com/parts/LTC4412ES6%23TRPBF/Analog%20Devices/view-part/4343773/?ref=eda, DigiKey-Purchase-URL=https://snapeda.com/shop?store=DigiKey&id=4343773, MF="Analog Devices", Mouser-Purchase-URL=https://snapeda.com/shop?store=Mouser&id=4343773, MP=LTC4412ES6#TRPBF, Price=None, SnapEDA_Link=https://www.snapeda.com/parts/LTC4412ES6%23TRPBF/Analog%20Devices/view-part/4343773/?ref=snap
U5: "Diode Array 1 Pair Common Cathode 45 V Surface Mount TO-263-3, D²Pak (2 Leads + Tab), TO-263AB", Mfr_Name=Vishay, Copyright="Copyright (C) 2023 Ultra Librarian. All rights reserved.", Manufacturer_Part_Number=MBRB2545CT, RefDes=RefDes, Type=DEV
U7: "16 Bit Analog to Digital Converter 4 Input 1 Sigma-Delta 14-SOIC", Package="SOIC-14 Microchip", Availability=Unavailable, MF=Microchip, MP=MCP3428-E/SL, Price=None, SnapEDA_Link=https://www.snapeda.com/parts/MCP3428-E/SL/Microchip/view-part/13249/?ref=snap
U8: library part TXB0102DCUR, "Voltage Level Translator Bidirectional 1 Circuit 2 Channel 20Mbps 8-MSOP", Voltage Range (VCCA)="1.2 V ~ 3.6 V", Voltage Range (VCCB)="1.65 V ~ 5.5 V", Channel Type=Bidirectional, Channels=2, Made By="Zach Ramsey", Max Rate="100 Mbps", Supplier 1=Digi-Key, Supplier Part Number 1=TXB0102DCUR
U10 U11 U12: "High-Side or Low-Side Gate Driver IC Non-Inverting 8-SOIC", Mfr_Name=Microchip, Copyright="Copyright (C) 2024 Ultra Librarian. All rights reserved.", Manufacturer_Part_Number=TC4432EOA713, RefDes=RefDes, Type=DEV
U13: "IC SWITCH SPST-NOX1 25OHM 6TSOP", Mfr_Name=Vishay, Copyright="Copyright (C) 2024 Ultra Librarian. All rights reserved.", Manufacturer_Part_Number=DG448DV-T1-E3, RefDes=RefDes, Type=DEV
Y1R: library part CRYSTAL_12MHz_SMD_SMALL, "12 MHz ±20ppm Crystal 18pF 100 Ohms 4-SMD, No Lead (3.2x2.5mm)", Frequency="12 MHz", Load Capacitance=18pF, Supplier Part Number 1=2151-RH100-12.000-18-2030-EXT-TRCT-ND, ESR="100 Ohms", Made By="Robert Pafford", Supplier 1=Digi-Key

## Free pads (board coordinates)
  round 0 hole 4.318: 1(6.35,6.35) 1(6.35,120.65) 1(171.45,6.35) 1(171.45,120.65)

## Via types
v1: diameter 0.705, hole 0.305, Top Layer to Bottom Layer, tented both sides, 119 vias
v2: diameter 0.7, hole 0.3, Top Layer to Bottom Layer, tented both sides, 51 vias
v3: diameter 0.711, hole 0.305, Top Layer to Bottom Layer, tented both sides, 35 vias
v4: diameter 0.914, hole 0.508, Top Layer to Bottom Layer, tented both sides, 35 vias
v5: diameter 0.8, hole 0.4, Top Layer to Bottom Layer, tented both sides, 28 vias
v6: diameter 1.15, hole 0.7, Top Layer to Bottom Layer, tented both sides, 6 vias
v7: diameter 1.651, hole 1.016, Top Layer to Bottom Layer, tented both sides, 4 vias
v8: diameter 1.27, hole 0.711, Top Layer to Bottom Layer, tented both sides, 1 vias

## Nets (pads, with @x,y where several pads share a name; then routed paths per layer and width w, separated by ;. In a path a pad name is that pad's centre, name@x,y a point inside that pad or via, vN(x,y) a via of type N, cw(c..) or ccw(c..) an arc to the next point about the centre after c; other vN are vias at no path point)
1v1_RP2040: C11R.1 C12R.1 C13R.1 U1R.23 U1R.45 U1R.50 | length 14.4
  Top Layer w0.2: U1R.50@25.392,36.005 v2(26.629,36.005) v2(26.629,38.005) U1R.45@25.392,38.005 ; v2@31.029,37.005 31.164,37.005 31.364,36.805 U1R.23@32.266,36.805
  Bottom Layer w0.4: C11R.1@25.464,38.005 v2(26.629,38.005) ; C13R.1@26.629,34.84 v2(26.629,36.005) 30.132,36.005 v2(31.029,36.902) 32.091,36.902 32.194,37.005 32.214,37.005 32.394,37.185 C12R.1@32.394,37.205
3V3_MEAS: R23.2 R27.1 U7.1 | length 7
  Top Layer w0.254: R27.1@62.611,47.79 R23.2@65.786,47.79 U7.1@65.786,43.942
3V3_RP2CAN: C1.1 C1C.1 C3C.1 C3R.1 C4.1 C4R.1 C5C.1 C5R.1 C6R.1 C7R.1 C8R.1 C9R.1 C10R.1 C17.1 C18.1 D1C.4 J1R.2 R1C.1 R2.1 R4C.1 R4R.1 R5R.1 R10.1 R23.1 R30.1 R31.1 R32.1 R33.1 R34.1 R39.1 U1.3 U1C.14 U1R.1 U1R.10 U1R.22 U1R.33 U1R.42 U1R.43 U1R.44 U1R.48 U1R.49 U2C.5 U2R.8 U3.2 U3.4 U7.6 U8.1 | length 212.7
  Top Layer w0.2: C4R.1@24.029,38.97 C4R.1@24.049,38.97 ; U1R.49@25.392,36.405 v2(24.254,36.405) 24.654,36.805 U1R.48@25.392,36.805 ; v2(25.829,31.805) 25.902,31.805 26.229,32.132 U1R.1@26.229,32.768 ; C10R.1@25.908,41.412 25.908,40.904 26.229,40.583 U1R.42@26.229,39.643 25.789,39.643 25.392,39.245 U1R.43@25.392,38.805 ; U1R.33@29.829,39.643 29.829,39.139 30.268,38.701 30.533,38.701 v2(30.629,38.605) ; v2(29.845,30.734) 29.831,30.748 29.831,32.03 29.829,32.032 U1R.10@29.829,32.768 29.829,33.271 30.063,33.505 30.476,33.505 31.296,33.505 31.518,33.726 31.518,35.581 31.229,35.87 v2(31.229,36.005) 31.629,36.405 U1R.22@32.266,36.405 ; v2@29.909,26.64 29.94,26.64 v2@29.989,26.591 ; C1C.1@41.616,48.828 C1C.1@41.629,48.84 ; C4R.1@24.049,38.97 24.889,38.97 25.054,38.805 U1R.43@25.392,38.805 ; C4R.1@24.049,38.97 24.229,38.79 24.229,38.77 24.594,38.405 U1R.44@25.392,38.405 U1R.43@25.392,38.805
  Top Layer w0.25: v6(18.124,34.805) U2R.8@18.124,36.654 ; D1C.4@38.429,29.355 38.437,29.363 39.768,29.363 C5C.1@39.829,29.301
  Top Layer w0.254: 16.637,27.559 16.764,27.432 ; 23.559,75.374 23.622,75.438 24.003,75.438 R39.1@25.384,75.438 ; C1.1@31.369,15.494 33.047,15.494 33.555,14.986 U1.3@33.655,14.986 ; R32.1@33.264,20.701 R32.1@33.274,20.711 ; C5C.1@39.829,29.301 C5C.1@39.829,29.355 ; 51.435,51.435 51.435,52.07 53.594,54.229 ; C17.1@58.674,54.229 61.049,54.229 65.341,49.936 65.341,49.873 65.722,49.492 R23.1@65.786,49.492
  Top Layer w0.3: J1R.2@48.264,38.335 48.357,38.428 48.357,39.133 48.478,39.254 48.478,40.557 48.429,40.605
  Top Layer w0.305: U8.1@44.068,62.347 45.17,62.347 45.593,61.924 45.593,58.726 45.772,58.547 49.276,58.547 53.594,54.229 C17.1@58.674,54.229
  Top Layer w0.4: U2R.8@18.124,36.654 C3R.1@18.124,38.605 ; v4(38.227,48.016) 38.412,48.016 39.211,48.815 U1C.14@39.554,48.815 ; U1C.14@39.566,48.828 C1C.1@41.616,48.828